# Altium PCB DashboardBoardREV2.PcbDoc (part 2 of 2)
Units mm, origin at the board's own origin, x right, y up, seen from the top; angles counter-clockwise.
Board outline 129.54 x 53.2 mm, 2 copper layers (Top Layer, Bottom Layer); 125 components, 110 nets, 472 pads, 144 vias.
Unrouted connection lines stored in the file: 8.
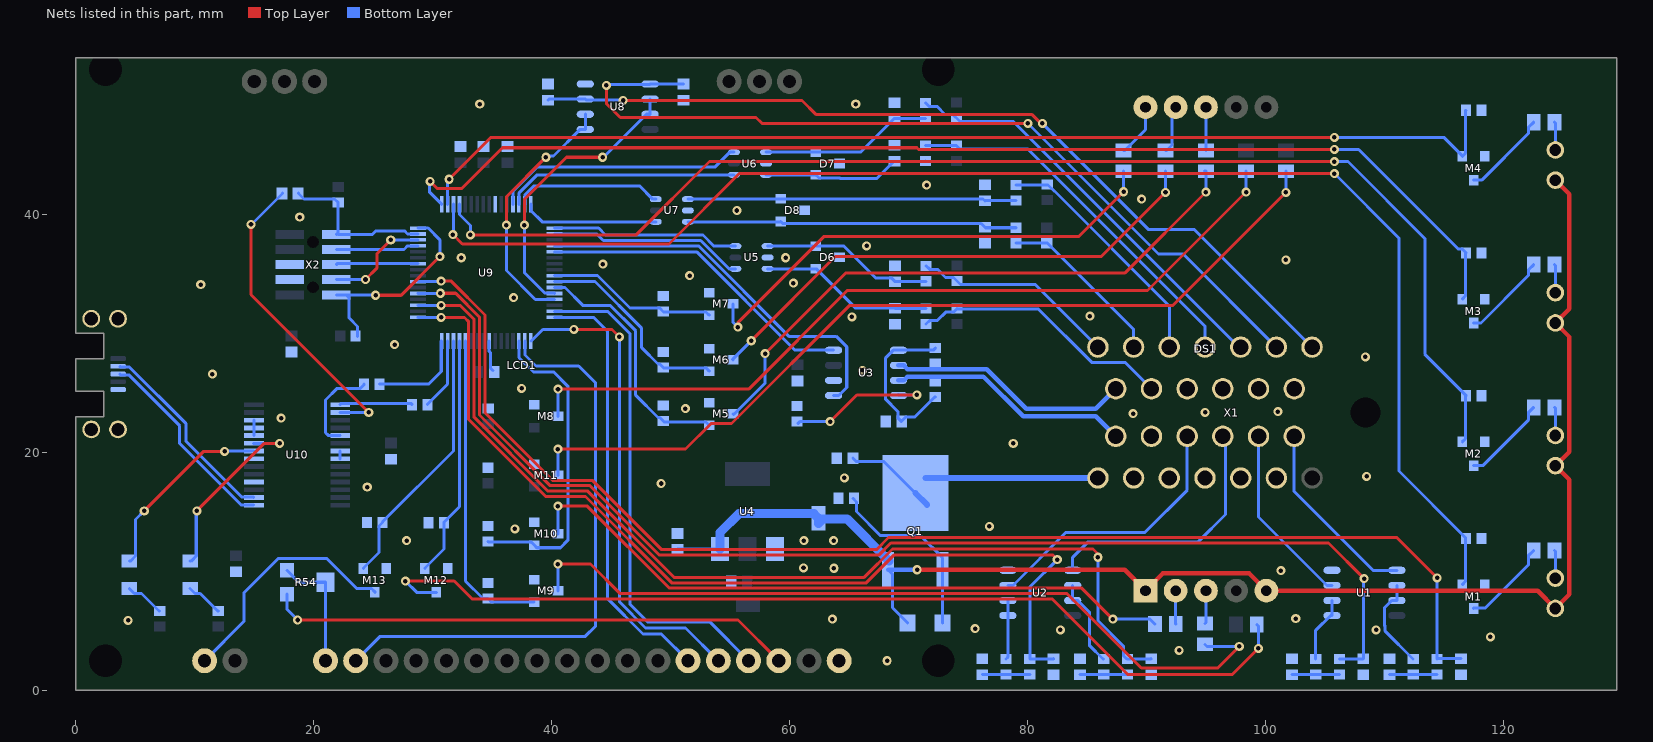
[diagram p2: the nets of this part, all layers, seen from the top]

## Via types
v1: diameter 0.762, hole 0.381, Top Layer to Bottom Layer, 144 vias

## Nets (pads, with @x,y where several pads share a name; then routed paths per layer and width w, separated by ;. In a path a pad name is that pad's centre, name@x,y a point inside that pad or via, vN(x,y) a via of type N, cw(c..) or ccw(c..) an arc to the next point about the centre after c; other vN are vias at no path point) (continued)
7SEG_c_SIG: M12.1 R48.2 U9.45 | length 20.3
  Bottom Layer w0.254: M12.1@29.35,10.252 29.35,10.302 30.95,11.902 R48.2@30.95,14.1 30.95,14.15 32.25,15.45 U9.45@32.25,29.375
7SEG_d: DS1.3 R21.2 | length 2.8
  Bottom Layer w0.254: R21.2@94.92,5.625 95,5.705 DS1.3@95,8.393
7SEG_d_SIG: M9.1 R45.2 U9.44 | length 26.7
  Bottom Layer w0.254: U9.44@32.75,29.375 32.75,28.511 32.758,28.503 32.758,9.192 34.225,7.725 R45.2@34.651,7.725 34.949,7.427 38.526,7.427 M9.1@38.526,7.425
7SEG_DP: DS1.8 R20.1 | length 3.6
  Bottom Layer w0.254: R20.1@95,45.4 DS1.8@95,49.033
7SEG_DP_SIG: M5.1 R41.2 U9.27 | length 21
  Bottom Layer w0.254: U9.27@40.25,33.875 41.114,33.875 42.606,32.383 44.91,32.383 47.058,30.235 47.058,24.826 48.938,22.946 49.077,22.946 R41.2@49.375,22.648 49.452,22.571 52.977,22.571 M5.1@53.25,22.298
7SEG_e: DS1.2 R22.2 | length 2.8
  Bottom Layer w0.254: DS1.2@92.46,8.393 92.46,5.59 R22.2@92.475,5.575
7SEG_e_SIG: M10.1 R46.2 U9.35 | length 26.6
  Bottom Layer w0.254: R46.2@34.65,12.527 34.677,12.5 38.252,12.5 M10.1@38.525,12.227 38.752,12 40.737,12 41.363,12.626 41.363,25.578 40.175,26.767 38.465,26.767 37.25,27.982 U9.35@37.25,29.375
7SEG_f: DS1.9 R23.1 | length 4
  Bottom Layer w0.254: R23.1@91.6,45.4 91.7,45.4 92.148,45.848 92.148,48.721 DS1.9@92.46,49.033
7SEG_f_SIG: M6.1 R42.2 U9.26 | length 17.1
  Bottom Layer w0.254: U9.26@40.25,34.375 43.637,34.375 47.566,30.446 47.566,28.818 48.938,27.446 49.077,27.446 R42.2@49.375,27.148 49.402,27.121 52.977,27.121 M6.1@53.25,26.848
7SEG_g: DS1.10 R24.1 | length 4.5
  Bottom Layer w0.254: R24.1@88.075,45.4 88.175,45.4 89.92,47.145 DS1.10@89.92,49.033
7SEG_g_SIG: M7.1 R43.2 U9.25 | length 14.4
  Bottom Layer w0.254: U9.25@40.25,34.875 41.114,34.875 41.122,34.883 43.847,34.883 46.584,32.146 49.077,32.146 49.402,31.821 52.977,31.821 M7.1@53.25,31.548
12V: C20.2 D1.1 D2.1 D3.1 D4.1 D5.2 DS1.1 DS1.5 Q1.2 TP1.1 U4.3 | length 124.8
  Top Layer w0.381: v1(70.721,10.15) 88.163,10.15 DS1.1@89.92,8.393 91.365,9.838 98.635,9.838 DS1.5@100.08,8.393 122.88,8.393 D1.1@124.374,6.899 125.559,8.084 125.559,17.714 D2.1@124.374,18.899 125.559,20.084 125.559,29.714 D3.1@124.374,30.899 125.559,32.084 125.559,41.714 D4.1@124.374,42.899
  Bottom Layer w0.254: C20.2@50.575,11.875 54.147,11.875 U4.3@54.16,11.888 ; Q1.2@68.285,10.15 68.658,9.777 68.658,6.967 69.9,5.725 D5.2@69.9,5.675
  Bottom Layer w0.381: Q1.2@68.285,10.15 v1(70.721,10.15)
  Bottom Layer w0.762: U4.3@54.16,11.888 U4.3@54.16,11.9 54.16,13.285 55.75,14.875 62.038,14.875 TP1.1@62.427,14.487 62.427,14.037 62.815,14.425 64.825,14.425 Q1.2@68.35,10.9
12V_HARNESS: C16.2 Q1.3 X1.1 | length 22.3
  Bottom Layer w0.254: C16.2@65.325,19.525 65.602,19.248 67.927,19.248 Q1.3@70.575,16.6
  Bottom Layer w0.508: Q1.3@70.575,16.6 Q1.3@71.561,15.614 ; Q1.3@71.436,17.864 X1.1@85.92,17.864
A1_Buffered: R3.1 U2.1 U2.2 | length 5
  Bottom Layer w0.254: R3.1@78.2,2.65 78.35,2.8 U2.1@78.35,6.295 U2.2@78.35,7.565
A1_Filtered: C7.2 R6.2 U9.49 | length 80.3
  Top Layer w0.254: v1(30.7,31.362) 32.667,31.362 33.028,31 33.028,22.772 39.5,16.3 42.847,16.3 50.091,9.056 66.456,9.056 68.8,11.4 82.1,11.4 v1(82.5,11)
  Bottom Layer w0.254: U9.49@28.75,31.375 28.757,31.368 30.693,31.368 v1(30.7,31.362) ; C7.2@82.2,2.675 82.175,2.65 R6.2@80.2,2.65 80.2,8.7 v1(82.5,11)
A1_Harness: U2.3 X1.10 | length 22.9
  Bottom Layer w0.254: U2.3@78.35,8.835 78.775,8.835 83.24,13.3 89.875,13.3 93.42,16.845 X1.10@93.42,21.364
A2_Buffered: R7.1 U2.6 U2.7 | length 7.5
  Bottom Layer w0.254: U2.6@83.8,8.835 U2.7@83.8,7.565 84.225,7.565 85.2,6.59 85.2,3.8 86.35,2.65 R7.1@86.4,2.65
A2_Filtered: C8.2 R8.2 U9.51 | length 84.5
  Top Layer w0.254: v1(30.7,32.378) 32.297,32.378 33.486,31.189 33.486,22.961 39.689,16.757 43.036,16.757 50.28,9.513 66.266,9.513 68.653,11.9 85.5,11.9 85.92,11.48 v1(85.92,11.2)
  Bottom Layer w0.254: U9.51@28.75,32.375 28.751,32.376 30.699,32.376 v1(30.7,32.378) ; v1(85.92,11.2) 85.92,5.88 88.052,3.748 88.052,2.948 88.35,2.65 R8.2@88.4,2.65 90.375,2.65 C8.2@90.4,2.675
A2_Harness: U2.5 X1.11 | length 22.1
  Bottom Layer w0.254: U2.5@83.8,10.105 83.8,11.2 85.1,12.5 94.35,12.5 96.639,14.789 96.639,18.395 96.65,18.406 96.65,21.134 X1.11@96.42,21.364
A3_Buffered: R2.1 U1.1 U1.2 | length 5.6
  Bottom Layer w0.254: R2.1@104.225,2.65 104.225,5.058 105.462,6.295 U1.1@105.6,6.295 U1.2@105.6,7.565
A3_Filtered: C6.2 R5.2 U9.53 | length 103.9
  Top Layer w0.254: v1(30.638,33.394) 31.928,33.394 33.943,31.379 33.943,23.15 39.879,17.214 43.225,17.214 49.059,11.381 67.488,11.381 68.507,12.4 105.3,12.4 v1(108.3,9.4)
  Bottom Layer w0.254: U9.53@28.75,33.375 28.759,33.384 30.629,33.384 v1(30.638,33.394) ; R5.2@106.225,2.65 108.2,2.65 C6.2@108.225,2.675 108.225,9.325 v1(108.3,9.4)
A3_Harness: U1.3 X1.12 | length 15.3
  Bottom Layer w0.254: X1.12@99.42,21.364 99.42,14.59 105.175,8.835 U1.3@105.6,8.835
A4_Buffered: R1.1 U1.6 U1.7 | length 7.9
  Bottom Layer w0.254: U1.6@111.05,8.835 U1.7@111.05,7.565 110.625,7.565 109.995,6.934 109.995,5.483 110.062,5.416 110.062,4.991 112.403,2.65 R1.1@112.425,2.65
A4_Filtered: C5.2 R4.2 U9.55 | length 110.5
  Top Layer w0.254: v1(30.7,34.41) 31.558,34.41 34.4,31.568 34.4,23.34 40.068,17.672 43.415,17.672 49.248,11.838 67.298,11.838 68.317,12.857 111.043,12.857 v1(114.425,9.475)
  Bottom Layer w0.254: U9.55@28.75,34.375 28.767,34.392 30.683,34.392 v1(30.7,34.41) ; v1(114.425,9.475) R4.2@114.425,2.65 114.45,2.675 C5.2@116.425,2.675
A4_Harness: U1.5 X1.13 | length 16
  Bottom Layer w0.254: X1.13@102.42,21.364 102.42,16.73 109.045,10.105 U1.5@111.05,10.105
B1_Conditioned: U6.6 U9.13 | length 21
  Bottom Layer w0.254: U9.13@36.75,40.875 36.75,41.96 38.776,43.987 53.712,43.987 54.975,45.25 U6.6@55.32,45.25
B1_Harness: R32.1 R38.1 X1.24 | length 35
  Bottom Layer w0.254: R38.1@71.425,49.4 71.723,49.102 72.386,49.102 73.065,48.423 73.727,48.423 74.323,47.827 78.808,47.827 97.771,28.864 X1.24@97.92,28.864
B2_Conditioned: U6.4 U9.14 | length 19.6
  Bottom Layer w0.254: U9.14@37.25,40.875 37.27,40.895 37.27,41.833 38.786,43.35 U6.4@55.32,43.35
B2_Harness: R31.1 R37.1 X1.23 | length 31.5
  Bottom Layer w0.254: R37.1@71.425,45.8 R31.1@74.025,45.8 74.323,45.502 80.04,45.502 94.92,30.622 X1.23@94.92,28.864
B3_Conditioned: U7.6 U9.15 | length 12.6
  Bottom Layer w0.254: U9.15@37.75,40.875 37.77,40.895 37.77,41.687 38.508,42.425 47.375,42.425 48.5,41.3 U7.6@48.75,41.3
B3_Harness: R25.1 R28.1 X1.22 | length 20.6
  Bottom Layer w0.254: R28.1@79.025,42.5 81.725,42.5 82.245,41.98 82.262,41.98 91.92,32.322 X1.22@91.92,28.864
B4_Conditioned: U7.4 U9.16 | length 11.4
  Bottom Layer w0.254: U9.16@38.25,40.875 38.25,40.35 39.2,39.4 U7.4@48.75,39.4
B4_Harness: R26.1 R27.1 X1.21 | length 14.4
  Bottom Layer w0.254: R27.1@79.025,37.6 81.675,37.6 88.92,30.355 X1.21@88.92,28.864
B5_Conditioned: U5.6 U9.17 | length 15.8
  Bottom Layer w0.254: U9.17@40.25,38.875 43.948,38.875 44.534,38.289 52.715,38.289 53.655,37.35 U5.6@55.45,37.35
B5_Harness: R30.1 R36.1 X1.20 | length 17.3
  Bottom Layer w0.254: R36.1@71.475,35.7 71.773,35.402 72.436,35.402 73.115,34.723 73.777,34.723 74.373,34.127 80.657,34.127 X1.20@85.92,28.864
B6_Conditioned: U5.4 U9.18 | length 16.4
  Bottom Layer w0.254: U9.18@40.262,38.363 U9.18@40.25,38.375 43.802,38.375 44.344,37.832 52.526,37.832 54.908,35.45 U5.4@55.45,35.45
B6_Harness: R29.1 R35.1 X1.15 | length 22.3
  Bottom Layer w0.254: R35.1@71.475,30.8 71.773,31.098 72.423,31.098 73.127,31.802 73.777,31.802 R29.1@74.075,32.1 74.088,32.087 80.885,32.087 85.389,27.583 88.201,27.583 X1.15@90.42,25.364
CAN_N: R34.2 U3.6 X1.14 | length 20.5
  Bottom Layer w0.381: U3.6@69.15,27.335 69.59,27.335 69.908,27.017 76.563,27.017 79.899,23.681 85.737,23.681 X1.14@87.42,25.364
CAN_P: R33.1 U3.7 X1.8 | length 20.5
  Bottom Layer w0.381: U3.7@69.15,26.065 69.59,26.065 69.908,26.382 76.299,26.382 79.635,23.046 85.738,23.046 X1.8@87.42,21.364
CBUS0: D9.2 U10.23 | length 16
  Top Layer w0.254: v1(10.175,15.1) 15.85,20.775 v1(17.125,20.775)
  Bottom Layer w0.254: D9.2@9.6,10.875 9.7,10.875 10.123,11.298 10.123,15.048 v1(10.175,15.1) ; U10.23@14.95,20.775 v1(17.125,20.775)
CBUS1: D10.2 U10.22 | length 16.1
  Top Layer w0.254: v1(5.75,15.1) 10.75,20.1 v1(12.5,20.1)
  Bottom Layer w0.254: D10.2@4.5,10.875 4.6,10.875 5.023,11.298 5.023,14.373 v1(5.75,15.1) ; v1(12.5,20.1) 12.513,20.113 14.937,20.113 U10.22@14.95,20.125
GND: C1.1 C2.1 C3.1 C4.1 C5.1 C6.1 C7.1 C8.1 C9.1 C10.1 C11.2 C12.1 C13.1 C14.1 C15.1 C16.1 C17.1 C18.1 C19.2 C20.1 C21.2 C22.1 C23.1 C24.1 C25.1 C26.1 C28.1 C29.1 D6.3 D7.3 D8.3 LCD1.1 M1.2 M2.2 M3.2 M4.2 M5.2 M6.2 M7.2 M8.2 M9.2 M10.2 M11.2 M12.2 M13.2 pad.0 pad.5 R13.1 R14.1 R15.1 R16.1 R39.1 R40.1 R41.1 R42.1 R43.1 R44.1 R45.1 R46.1 R47.1 R48.1 R50.1 U1.4 U2.4 U3.2 U4.1 U5.2 U6.2 U7.2 U8.4 U9.10 U9.40 U10.7 U10.8 U10.18 U10.21 U10.24 U10.25 U10.26 X1.2 X1.3 X1.4 X1.5 X1.6 X1.9 X1.16 X1.17 X1.18 X1.19 X2.3 X2.5 | length 4.6
  Bottom Layer w0.254: U10.24@14.975,21.425 U10.25@14.975,22.075 U10.26@14.975,22.725 ; U10.8@22.225,19.475 U10.7@22.225,20.125 ; U9.40@34.75,29.375 34.75,28.511 34.852,28.409 34.852,27.098 C23.1@35.059,26.891
  other v1: 68.2,2.5 92.743,3.376 118.903,4.5 82.76,5.1 109.3,5.1 75.6,5.2 4.4,5.9 63.6,6 102.547,6.041 101.3,10.075 63.725,10.275 61.169,10.3 27.8,12.6 61.2,12.6 63.7,12.6 36.9,13.592 76.8,13.8 24.5,17.1 49.2,17.4 64.6,17.875 108.5,17.991 78.8,20.775 17.258,22.9 88.875,23.275 94.925,23.375 101.05,23.45 51.249,23.703 37.475,25.402 11.488,26.6 66.125,26.917 108.4,28.041 26.8,29.068 65.235,31.4 85.25,31.463 36.8,33.031 10.5,34.125 60.315,34.25 51.6,34.875 44.3,35.844 101.725,36.2 32.4,36.375 59.675,36.379 66.475,37.375 18.825,39.8 55.57,40.35 89.597,41.3 71.521,42.475 33.957,49.3 65.562,49.3
JTAG_RST: C27.1 R53.1 U9.63 X2.10 | length 13.4
  Bottom Layer w0.254: C27.1@18.725,41.825 18.725,41.775 19.177,41.323 21.752,41.323 R53.1@22.05,41.025 ; X2.10@21.9,38.34 22.025,38.465 R53.1@22.025,41.025 ; X2.10@22.025,38.34 24.928,38.34 25.225,38.637 27.624,38.637 27.886,38.375 U9.63@28.75,38.375
JTAG_TCLK: U9.62 X2.4 | length 8.9
  Top Layer w0.254: v1(24.35,34.55) 25.3,35.5 25.3,36.7 v1(26.475,37.875)
  Bottom Layer w0.254: X2.4@21.9,34.53 21.91,34.54 24.34,34.54 v1(24.35,34.55) ; v1(26.475,37.875) U9.62@28.75,37.875
JTAG_TDI: U9.61 X2.8 | length 7
  Bottom Layer w0.254: X2.8@21.9,37.07 27.581,37.07 27.886,37.375 U9.61@28.75,37.375
JTAG_TDO: U9.58 X2.6 | length 6.9
  Bottom Layer w0.254: X2.6@21.9,35.8 21.975,35.875 U9.58@28.75,35.875
JTAG_TMS: R52.1 U9.64 X2.2 | length 17.6
  Top Layer w0.254: v1(25.2,33.225) 27.35,33.225 v1(30.6,36.475)
  Bottom Layer w0.254: X2.2@21.9,33.26 22.72,33.26 X2.2@22.738,33.242 ; R52.1@23.675,29.75 23.675,30.606 22.973,31.308 22.973,33.007 X2.2@22.738,33.242 ; v1(25.2,33.225) 25.183,33.242 X2.2@22.738,33.242 ; U9.64@28.75,38.875 29.614,38.875 30.6,37.889 v1(30.6,36.475)
LCD_BL: M13.1 R50.2 U9.46 | length 22.3
  Bottom Layer w0.254: M13.1@24.181,10.252 24.181,10.302 25.483,11.604 25.483,13.829 R50.2@25.781,14.127 25.781,14.177 31.742,20.138 31.742,25.524 31.758,25.54 31.758,28.503 31.75,28.511 U9.46@31.75,29.375
LCD_RESET: LCD1.17 U9.34 | length 49.9
  Bottom Layer w0.254: LCD1.17@23.53,2.5 25.58,4.55 42.825,4.55 43.7,5.425 43.7,25.85 42.275,27.275 38.675,27.275 37.75,28.2 U9.34@37.75,29.375
LCD_SPI_CLK: LCD1.6 U9.32 | length 36.3
  Bottom Layer w0.254: U9.32@40.25,31.344 43.556,31.344 44.675,30.225 44.675,7.761 47.682,4.753 49.217,4.753 LCD1.6@51.47,2.5
LCD_SPI_CS: LCD1.4 U9.31 | length 41.8
  Bottom Layer w0.254: U9.31@40.25,31.875 44.7,31.875 46.601,29.974 46.601,7.222 48.053,5.769 53.281,5.769 LCD1.4@56.55,2.5
LCD_SPI_SDA: LCD1.5 U9.33 | length 40.7
  Top Layer w0.254: v1(41.875,30.35) 45.075,30.35 v1(45.7,29.725)
  Bottom Layer w0.254: U9.33@38.281,29.375 39.256,30.35 v1(41.875,30.35) ; v1(45.7,29.725) 45.7,7.454 47.893,5.261 51.249,5.261 LCD1.5@54.01,2.5
LED1: M3.1 R16.2 U9.1 | length 98.8
  Top Layer w0.254: v1(29.775,42.8) 30.373,42.202 32.452,42.202 35.874,45.624 70.698,45.624 70.838,45.483 v1(105.8,45.483)
  Bottom Layer w0.254: v1@30,42.7 29.75,42.45 29.75,41.875 U9.1@30.75,40.875 ; v1(105.8,45.483) 107.842,45.483 116.203,37.122 116.552,37.122 116.85,36.824 R16.2@116.85,36.774 116.823,36.747 116.823,33.172 M3.1@116.55,32.899
LED2: M4.1 R15.2 U9.2 | length 93.2
  Top Layer w0.254: v1(31.375,42.975) 34.899,46.499 v1(105.8,46.499)
  Bottom Layer w0.254: U9.2@31.25,40.875 v1@31.25,42.7 ; v1(105.8,46.499) 115,46.499 116.55,44.949 M4.1@116.55,44.899 116.823,45.172 116.823,48.747 R15.2@116.85,48.774
LED3: M1.1 R13.2 U9.3 | length 118.7
  Top Layer w0.254: v1(31.7,38.325) 32.487,37.538 49.86,37.538 55.773,43.451 v1(105.8,43.451)
  Bottom Layer w0.254: v1(31.7,38.325) 31.75,38.375 U9.3@31.75,40.875 ; v1(105.8,43.451) 111.225,38.026 111.225,18.449 116.823,12.851 116.823,9.172 M1.1@116.55,8.899
LED4: M2.1 R14.2 U9.4 | length 107.1
  Top Layer w0.254: v1(33.175,38.3) 47.1,38.3 53.267,44.467 v1(105.8,44.467)
  Bottom Layer w0.254: U9.4@32.25,40.875 32.25,40.011 33.175,39.086 v1(33.175,38.3) ; v1(105.8,44.467) 106.933,44.467 113.4,38 113.4,28.274 116.85,24.824 R14.2@116.85,24.774 116.823,24.747 116.823,21.172 M2.1@116.55,20.899
LED_Negative_U_LED_Driver1: M12.3 R18.1 | length 80.9
  Top Layer w0.254: v1(27.7,9.2) 31.8,9.2 33.316,7.684 82.085,7.684 88.419,1.35 97.212,1.35 v1(99.4,3.538)
  Bottom Layer w0.254: v1(27.7,9.2) 28.648,8.252 M12.3@30.3,8.252 ; R18.1@99.275,5.55 99.4,5.425 v1(99.4,3.538)
LED_Negative_U_LED_Driver2: M9.3 R21.1 | length 66.8
  Top Layer w0.254: v1(40.526,10.626) 43.274,10.626 45.759,8.141 83.328,8.141 89.569,1.9 96,1.9 v1(97.8,3.7)
  Bottom Layer w0.254: M9.3@40.526,8.375 v1(40.526,10.626) ; R21.1@94.92,3.875 95.095,3.7 v1(97.8,3.7)
LED_Negative_U_LED_Driver3: M10.3 R22.1 | length 56.6
  Top Layer w0.254: v1(40.525,15.5) 43,15.5 49.901,8.599 84.57,8.599 v1(87.169,6)
  Bottom Layer w0.254: M10.3@40.525,13.177 v1(40.525,15.5) ; v1(87.169,6) 90.3,6 R22.1@90.725,5.575
LED_Negative_U_LED_Driver4: M11.3 R17.2 | length 74.1
  Top Layer w0.254: v1(40.525,20.293) 51.249,20.293 53.404,22.448 55.123,22.448 65.058,32.383 92.233,32.383 v1(101.725,41.875)
  Bottom Layer w0.254: M11.3@40.525,18.075 v1(40.525,20.293) ; v1(101.725,41.875) R17.2@101.725,43.65
LED_Negative_U_LED_Driver5: M8.3 R19.2 | length 68.7
  Top Layer w0.254: v1(40.532,25.332) 56.557,25.332 64.841,33.616 90.091,33.616 v1(98.375,41.9)
  Bottom Layer w0.254: M8.3@40.532,23.053 v1(40.532,25.332) ; v1(98.375,41.9) R19.2@98.375,43.65
LED_Negative_U_LED_Driver6: M5.3 R20.2 | length 50.8
  Top Layer w0.254: v1(57.95,28.325) 64.738,35.113 88.213,35.113 v1(95,41.9)
  Bottom Layer w0.254: M5.3@55.25,23.248 55.298,23.2 57.95,25.852 v1(57.95,28.325) ; R20.2@94.9,43.65 R20.2@95,43.65 v1(95,41.9)
LED_Negative_U_LED_Driver7: M6.3 R23.2 | length 44
  Top Layer w0.254: v1(56.775,29.4) 63.85,36.475 86.2,36.475 v1(91.6,41.875)
  Bottom Layer w0.254: M6.3@55.25,27.798 55.252,27.8 55.213,27.838 v1(56.775,29.4) ; v1(91.6,41.875) R23.2@91.6,43.65
LED_Negative_U_LED_Driver8: M7.3 R24.2 | length 41.2
  Top Layer w0.254: v1(55.65,30.55) 55.65,30.911 62.914,38.175 84.325,38.175 v1(88.075,41.925)
  Bottom Layer w0.254: M7.3@55.25,32.498 55.25,30.95 v1(55.65,30.55) ; v1(88.075,41.925) R24.2@88.075,43.65
LED_Negative_U_LED_Driver9: LCD1.20 M13.3 | length 20.5
  Bottom Layer w0.254: LCD1.20@10.83,2.5 14.14,5.81 14.14,8.229 16.992,11.081 21.108,11.081 23.614,8.575 24.858,8.575 25.131,8.302 M13.3@25.131,8.252
LED_Negative_U_LED_Driver10: M2.3 R10.2 | length 7.4
  Bottom Layer w0.254: M2.3@117.5,18.899 118.274,18.899 122.102,22.727 122.102,23.352 R10.2@122.55,23.8
LED_Negative_U_LED_Driver11: M1.3 R9.2 | length 7.6
  Bottom Layer w0.254: M1.3@117.5,6.899 117.5,6.949 118.5,6.949 122.102,10.551 122.102,11.327 R9.2@122.55,11.775
LED_Negative_U_LED_Driver12: M4.3 R12.2 | length 7.4
  Bottom Layer w0.254: M4.3@117.5,42.899 118.174,42.899 122.102,46.827 122.102,47.32 R12.2@122.55,47.768
LED_Negative_U_LED_Driver13: M3.3 R11.2 | length 7.4
  Bottom Layer w0.254: M3.3@117.5,30.899 118.124,30.899 122.102,34.877 122.102,35.352 R11.2@122.55,35.8
NetC6_2: C27.2 U10.2 | length 26.1
  Top Layer w0.254: v1(14.725,39.175) 14.725,33.275 v1(24.625,23.375)
  Bottom Layer w0.254: v1(14.725,39.175) 14.775,39.175 17.375,41.775 C27.2@17.375,41.825 ; U10.2@22.2,23.375 v1(24.625,23.375)
NetC16_U_ButtonBuffering1_2: C13.2 D6.2 R36.2 U5.1 | length 14.6
  Bottom Layer w0.254: U5.1@58.15,37.35 D6.2@62.2,37.35 64.567,37.35 67.231,34.686 68.552,34.686 C13.2@68.875,34.363 68.912,34.4 R36.2@71.475,34.4
NetC16_U_ButtonBuffering2_2: C15.2 D7.2 R38.2 U6.1 | length 14.6
  Bottom Layer w0.254: U6.1@58.02,45.25 D7.2@62.2,45.25 65.962,45.25 68.775,48.063 C15.2@68.825,48.063 71.388,48.063 R38.2@71.425,48.1
NetC16_U_ButtonBuffering3_2: C10.2 D8.2 R28.2 U7.1 | length 27.7
  Bottom Layer w0.254: U7.1@51.45,41.3 59.225,41.3 D8.2@59.25,41.325 76.263,41.325 C10.2@76.425,41.163 76.462,41.2 R28.2@79.025,41.2
NetC17_U_ButtonBuffering1_2: C12.2 D6.1 R35.2 U5.3 | length 14.7
  Bottom Layer w0.254: U5.3@58.15,35.45 D6.1@62.2,35.45 62.25,35.45 65.562,32.138 C12.2@68.875,32.138 68.913,32.1 R35.2@71.475,32.1
NetC17_U_ButtonBuffering2_2: C14.2 D7.1 R37.2 U6.3 | length 14.1
  Bottom Layer w0.254: U6.3@58.02,43.35 D7.1@62.2,43.35 62.473,43.077 64.238,43.077 64.26,43.055 67.342,43.055 68.775,44.488 C14.2@68.825,44.488 71.413,44.488 R37.2@71.425,44.5
NetC17_U_ButtonBuffering3_2: C9.2 D8.1 R27.2 U7.3 | length 27.8
  Bottom Layer w0.254: U7.3@51.45,39.4 59.225,39.4 D8.1@59.25,39.425 59.414,39.261 76.102,39.261 C9.2@76.425,38.938 76.463,38.9 R27.2@79.025,38.9
NetC18_U_PassiveFilter1_2: C2.2 R1.2 R4.1 | length 4
  Bottom Layer w0.254: C2.2@110.425,1.325 110.45,1.35 R1.2@112.425,1.35 R4.1@114.425,1.35
NetC18_U_PassiveFilter2_2: C3.2 R2.2 R5.1 | length 4
  Bottom Layer w0.254: C3.2@102.225,1.325 102.25,1.35 R2.2@104.225,1.35 R5.1@106.225,1.35
NetC18_U_PassiveFilter3_2: C1.2 R7.2 R8.1 | length 4
  Bottom Layer w0.254: C1.2@84.4,1.325 88.375,1.325 R8.1@88.4,1.35
NetC18_U_PassiveFilter4_2: C4.2 R3.2 R6.1 | length 4
  Bottom Layer w0.254: C4.2@76.2,1.325 76.225,1.35 R3.2@78.2,1.35 R6.1@80.2,1.35
NetD1_1: D9.1 R55.1 | length 3.2
  Bottom Layer w0.254: D9.1@9.6,8.575 10.023,8.152 10.448,8.152 11.925,6.675 R55.1@11.975,6.675
NetD2_1: D10.1 R56.1 | length 3.3
  Bottom Layer w0.254: D10.1@4.5,8.575 4.923,8.152 5.523,8.152 7,6.675 R56.1@7.05,6.675
NetD3_1: D5.1 Q1.1 R39.2 | length 15.6
  Bottom Layer w0.254: R39.2@65.325,16.15 65.623,15.852 65.623,15.038 67.642,13.019 70.996,13.019 72.865,11.15 72.865,5.69 D5.1@72.85,5.675
NetD4_2: D3.2 R11.1 | length 2.4
  Bottom Layer w0.254: R11.1@124.3,35.8 124.374,35.726 D3.2@124.374,33.439
NetD5_2: D4.2 R12.1 | length 2.4
  Bottom Layer w0.254: R12.1@124.3,47.768 124.374,47.694 D4.2@124.374,45.439
NetD6_2: D1.2 R9.1 | length 2.4
  Bottom Layer w0.254: R9.1@124.3,11.775 124.374,11.701 D1.2@124.374,9.439
NetD7_2: D2.2 R10.1 | length 2.4
  Bottom Layer w0.254: R10.1@124.3,23.8 124.374,23.726 D2.2@124.374,21.439
NetR12_1: R51.1 U10.5 | length 7.9
  Bottom Layer w0.254: U10.5@22.2,21.425 22.176,21.449 21.217,21.449 20.994,21.672 20.994,24.428 21.968,25.402 23.927,25.402 24.225,25.7 R51.1@24.225,25.75
NetR13_1: R49.1 U10.1 | length 6.2
  Bottom Layer w0.254: U10.1@22.2,24.025 22.312,24.137 28.163,24.137 R49.1@28.275,24.025
P1_Conditioned: U8.1 U8.2 U9.29 | length 21.5
  Top Layer w0.254: v1(36.2,39.125) 36.2,41.516 v1(39.509,44.825)
  Bottom Layer w0.254: v1(36.2,39.125) 36.2,35.298 38.623,32.875 U9.29@40.25,32.875 ; v1(39.509,44.825) 39.606,44.922 40.152,44.922 42.4,47.17 U8.1@42.825,47.17 U8.2@42.825,48.44
P1_Harness: C21.1 U8.3 X1.26 | length 72.9
  Top Layer w0.254: v1(46,49.6) 61.036,49.6 62.202,48.434 80.356,48.434 81.118,47.672 v1(81.25,47.672)
  Bottom Layer w0.254: C21.1@39.7,49.625 39.785,49.71 U8.3@42.825,49.71 42.88,49.655 45.945,49.655 v1(46,49.6) ; v1(81.25,47.672) 90.185,38.737 94.047,38.737 X1.26@103.92,28.864
P2_Conditioned: U8.6 U8.7 U9.28 | length 24.2
  Top Layer w0.254: v1(37.7,39.125) 37.7,41.27 41.255,44.825 v1(44.275,44.825)
  Bottom Layer w0.254: v1(37.7,39.125) 37.7,35.133 39.438,33.395 40.23,33.395 U9.28@40.25,33.375 ; v1(44.275,44.825) 44.35,44.825 47.965,48.44 U8.7@48.275,48.44 U8.6@48.275,49.71
P2_Harness: C19.1 U8.5 X1.25 | length 72.8
  Top Layer w0.254: v1(44.6,50.875) 44.6,49.35 45.775,48.175 57.175,48.175 57.678,47.672 v1(80.04,47.672)
  Bottom Layer w0.254: v1(44.6,50.875) 44.653,50.928 48.222,50.928 U8.5@48.275,50.98 51.07,50.98 C19.1@51.075,50.975 ; v1@80.04,47.625 80.087,47.625 91.012,36.7 93.084,36.7 X1.25@100.92,28.864
RXCAN: U3.4 U9.21 | length 26.9
  Bottom Layer w0.254: U9.21@40.25,36.875 52.19,36.875 60.46,28.605 U3.4@63.7,28.605
SPLIT: C11.1 R33.2 R34.1 U3.5 | length 14.2
  Bottom Layer w0.254: R33.2@72.25,24.675 72.2,24.675 70.498,22.973 69.748,22.973 69.425,22.65 C11.1@69.425,22.6 69.102,22.923 69.102,23.455 68.044,24.513 68.044,27.924 68.725,28.605 72.08,28.605 R34.1@72.25,28.775
STBY: R40.2 U3.8 | length 12.6
  Top Layer w0.254: v1(63.4,22.6) 65.648,24.847 v1(70.697,24.847)
  Bottom Layer w0.254: R40.2@60.69,22.425 60.865,22.6 v1(63.4,22.6) ; U3.8@69.15,24.9 69.203,24.847 v1(70.697,24.847)
TXCAN: U3.1 U9.20 | length 32.9
  Bottom Layer w0.254: U9.20@40.25,37.375 52.337,37.375 59.937,29.775 63.918,29.775 64.806,28.887 64.806,25.476 64.125,24.795 U3.1@63.7,24.795
USB_DM: pad.2 U10.16 | length 16.7
  Bottom Layer w0.254: pad.2@3.7,27.25 3.769,27.181 4.518,27.181 9.242,22.456 9.242,20.974 13.967,16.249 14.926,16.249 U10.16@14.95,16.225
USB_DP: pad.3 U10.15 | length 16.7
  Bottom Layer w0.254: pad.3@3.7,26.6 3.769,26.531 4.449,26.531 8.734,22.246 8.734,20.763 13.899,15.599 14.926,15.599 U10.15@14.95,15.575
USB_UART_RX: R51.2 U9.48 | length 8.2
  Bottom Layer w0.254: R51.2@25.525,25.75 29.649,25.75 30.719,26.82 U9.48@30.719,29.375
USB_UART_TX: R49.2 U9.47 | length 6
  Bottom Layer w0.254: R49.2@29.575,24.025 29.575,24.075 31.25,25.75 U9.47@31.25,29.375
Vo_LCD: LCD1.3 R54.1 | length 44.4
  Top Layer w0.254: v1(18.65,5.925) 55.665,5.925 LCD1.3@59.09,2.5
  Bottom Layer w0.254: R54.1@17.75,8.1 17.75,6.825 v1(18.65,5.925)
Vout_LCD: LCD1.18 R54.2 R54.3 | length 10.3
  Bottom Layer w0.254: R54.3@17.75,10.1 18.75,9.1 R54.2@21,9.1 20.99,9.09 LCD1.18@20.99,2.5
pads on no net: LCD1. LCD1.7 LCD1.8 LCD1.9 LCD1.10 LCD1.11 LCD1.12 LCD1.13 LCD1.14 LCD1.15 LCD1.16 LCD1.21 LCD1.22 LCD1.23 LCD1.24 U9.5 U9.6 U9.11 U9.12 U9.19 U9.22 U9.23 U9.24 U9.30 U9.38 U9.39 U9.42 U9.43 U9.50 U9.52 U9.54 U9.56 U9.57 U9.59 U9.60 U10.3 U10.6 U10.9 U10.10 U10.11 U10.12 U10.13 U10.14 U10.27 U10.28 X1.27 X2.7 X2.9 X2.MH1 X2.MH2
copper on no net:
  other v1: 104.1,11.2

## Polygon pours and split planes (outlines as drawn)
5V on Top Layer "Top Layer-5V" (solid, pour order 4): 59.39,21.35 53.556,21.35 53.325,21.119 53.325,16.281 53.581,16.025 59.35,16.025 59.6,16.275 59.6,21.12
GND on Top Layer "Bottom Layer-No Net 1" (solid, pour order 8): 129.54,60 -10,60 -10,-10 129.54,-10
5V on Bottom Layer "Bottom Layer-5V" (solid, pour order 2): 59.39,21.35 53.556,21.35 53.325,21.119 53.325,16.281 53.581,16.025 59.35,16.025 59.6,16.275 59.6,21.12
GND on Bottom Layer "Bottom Layer-No Net" (solid, pour order 6): 129.54,60.1 -10,60.1 -10,-9.9 129.54,-9.9
no net on Bottom Solder "Top Layer-5V" (solid): 59.39,21.35 53.556,21.35 53.325,21.119 53.325,16.281 53.581,16.025 59.35,16.025 59.6,16.275 59.6,21.12
5V on Top Solder "Top Layer-5V" (solid, pour order 0): 59.39,21.35 53.556,21.35 53.325,21.119 53.325,16.281 53.581,16.025 59.35,16.025 59.6,16.275 59.6,21.12

## Other copper
Bottom Layer:
  pour cut-out: 8,18.5 ccw(c8,19) 8.5,19 ccw(c8,19) 8,19.5 ccw(c8,19) 7.5,19 ccw(c8,19)
  pour cut-out: 2.5,18.5 ccw(c2.5,19) 3,19 ccw(c2.5,19) 2.5,19.5 ccw(c2.5,19) 2,19 ccw(c2.5,19)
  pour cut-out: 6.5,17 ccw(c6.5,18) 7.5,18 ccw(c6.5,18) 6.5,19 ccw(c6.5,18) 5.5,18 ccw(c6.5,18)
  pour cut-out: 4,17 ccw(c4,18) 5,18 ccw(c4,18) 4,19 ccw(c4,18) 3,18 ccw(c4,18)
  pour cut-out: 2,19.5
  pour cut-out: 6,19
  pour cut-out: 4.4,18.1
  pour cut-out: 107.4,34.7

## Silkscreen, mask and mechanical layers (free items; w line width, h text height)
Top Overlay:
  text "F" at 14.5,6.2 h30
Bottom Overlay:
  lines w0.2: -0.055,22.995 2.345,22.995 2.345,25.155 -0.055,25.155 ; -0.05,21.8 -0.05,31.25 ; -0.05,27.895 2.35,27.895 2.35,30.055 -0.05,30.055
  text "Dashboard" at 15.675,41.163 h1.65
  text "REV 2.1 (02/2020)" at 8.75,39.65 h1
  text "Design and Layout by: / Kevin Jung / Lynette Cox" at 14.975,32.2 h1.5
  text "a" at 27.55,29.25 h20
Mechanical 15:
  the board outline again, w0.254

## Text inside footprints (layer, text, board x,y; h text height)
D9: Bottom Overlay "*" at 10.108,11.249 h1.52 r270
D10: Bottom Overlay "*" at 5.008,11.249 h1.52 r270